# EAGLE board choque (EAGLE 5.06)
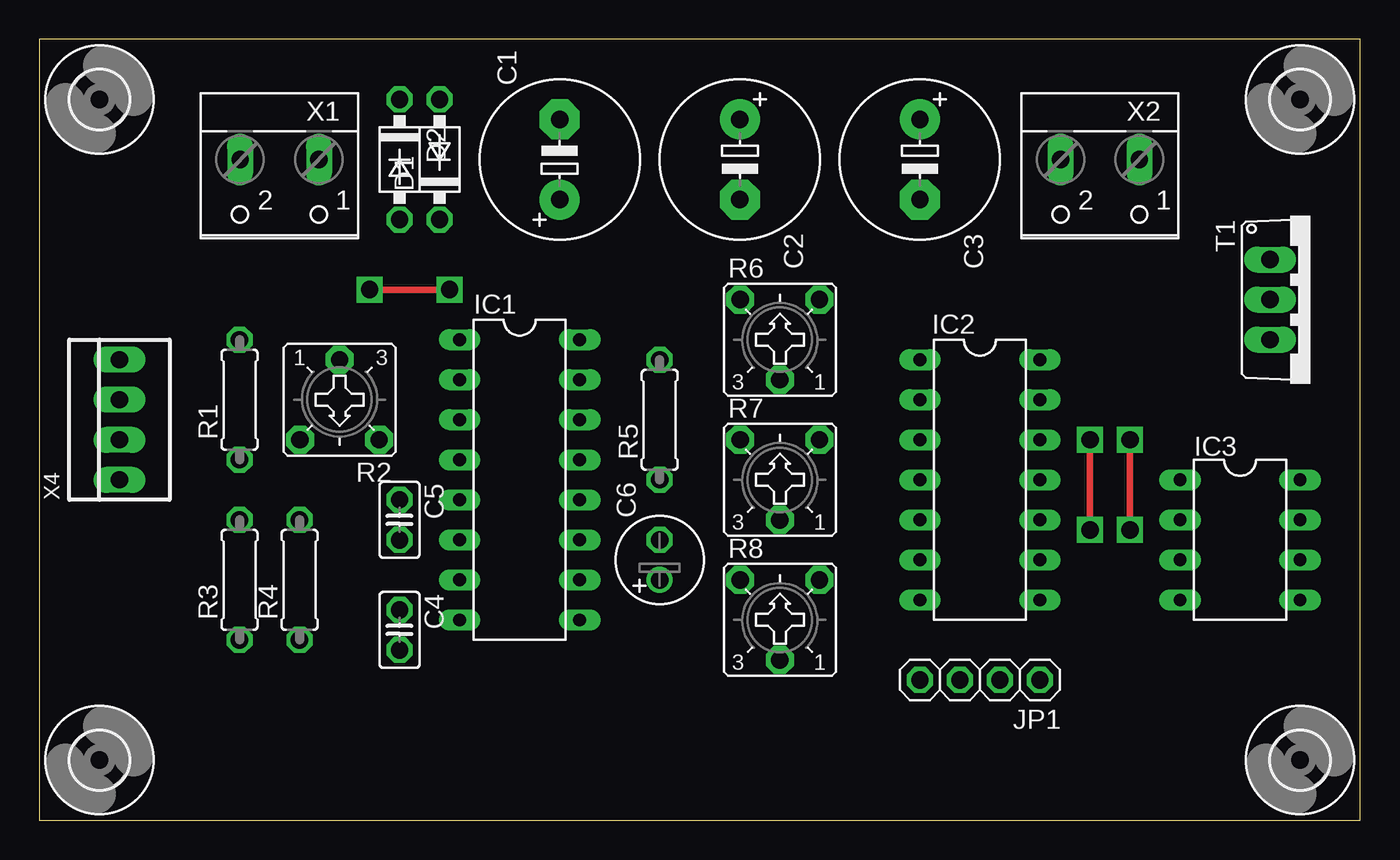
[diagram p0: board, top side]
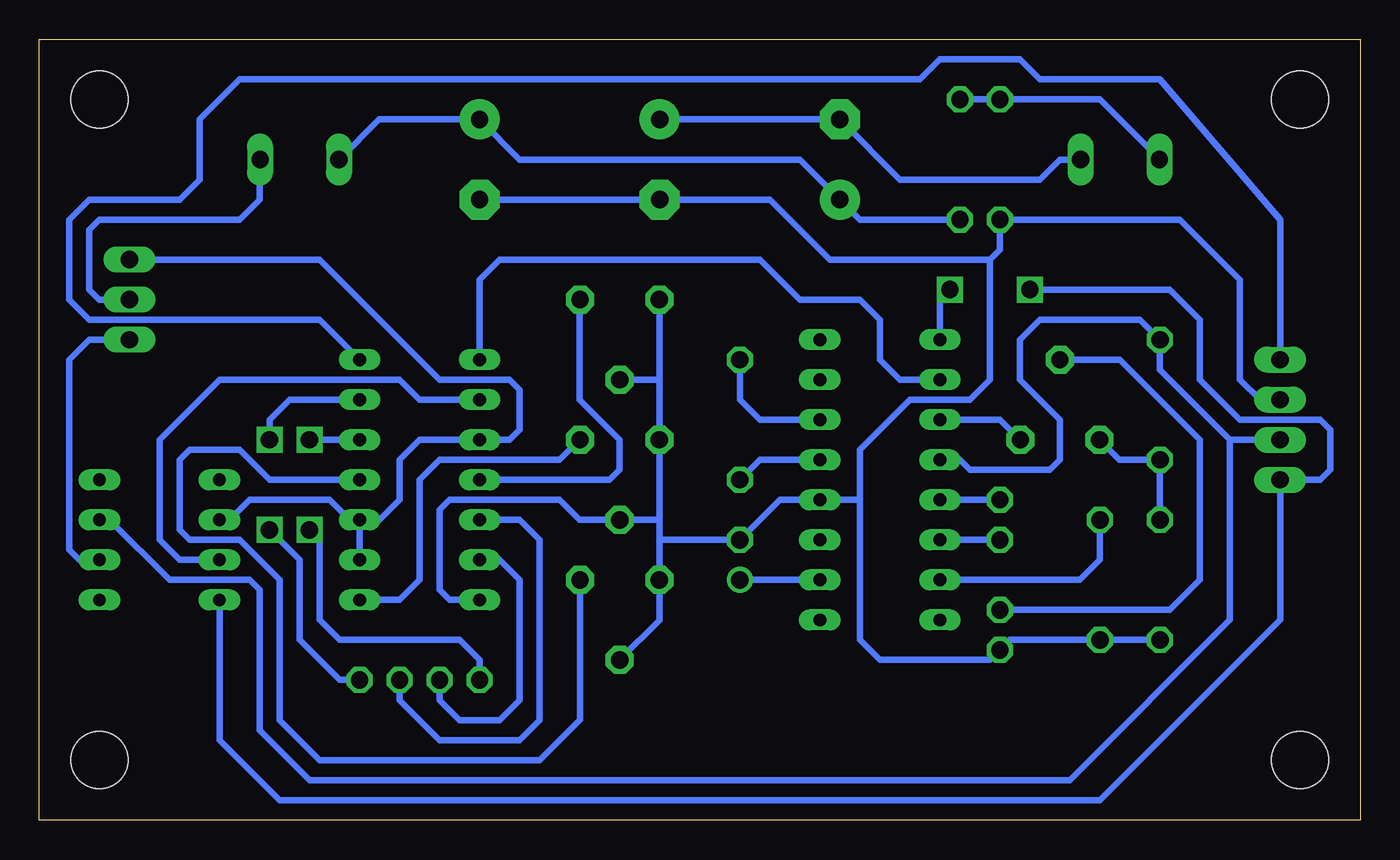
[diagram p1: board, bottom side, seen from below]

Size 83.82 x 49.53 mm. Coordinates in mm from the lower left corner, seen from the top.
Outline: 0,0 83.82,0 83.82,49.53 0,49.53 0,0
Copper layers (1*16): Top 0.035mm / dielectric 1.5mm / Bottom 0.035mm
Design rules "default": minimum track width 10mil, minimum drill 24mil, track to track 8mil, track to pad 8mil, pad to pad 8mil, via to via 8mil, smd to smd 8mil, copper to edge 40mil, drill to drill 8mil, minimum pad ring 10mil, minimum via ring 8mil, stop-mask expansion 4mil, vias tented up to drill 0mil, thermal gap 10mil

## Footprints (pad centres in the part's own frame; a part is rotated, then mirrored left to right if it is on the bottom)
E5-10,5 = drill 1.1 pad 2.54 round: + -2.54,0 | drill 1.1 pad 2.54 octagon: - 2.54,0
C025-025X050 = drill 1.1 octagon: 1 -1.27,0; 2 1.27,0
E2,5-6 = drill 1.1 round: + -1.27,0 | drill 1.1 pad 1.6 octagon: - 1.27,0
DO41-10 = drill 1.1 octagon: A 3.81,0; C -3.81,0
DIL16 = drill 0.813 long: 1 -8.89,-3.81; 2 -6.35,-3.81; 3 -3.81,-3.81; 4 -1.27,-3.81; 5 1.27,-3.81; 6 3.81,-3.81; 7 6.35,-3.81; 8 8.89,-3.81; 9 8.89,3.81; 10 6.35,3.81; 11 3.81,3.81; 12 1.27,3.81; 13 -1.27,3.81; 14 -3.81,3.81; 15 -6.35,3.81; 16 -8.89,3.81
DIL14 = drill 0.813 long: 1 -7.62,-3.81; 2 -5.08,-3.81; 3 -2.54,-3.81; 4 0,-3.81; 5 2.54,-3.81; 6 5.08,-3.81; 7 7.62,-3.81; 8 7.62,3.81; 9 5.08,3.81; 10 2.54,3.81; 11 0,3.81; 12 -2.54,3.81; 13 -5.08,3.81; 14 -7.62,3.81
DIL08 = drill 0.813 long: 1 -3.81,-3.81; 2 -1.27,-3.81; 3 1.27,-3.81; 4 3.81,-3.81; 5 3.81,3.81; 6 1.27,3.81; 7 -1.27,3.81; 8 -3.81,3.81
1X04 = drill 1.1 octagon: 1 -3.81,0; 2 -1.27,0; 3 1.27,0; 4 3.81,0
0207/7 = drill 1.1 octagon: 1 -3.81,0; 2 3.81,0
CT6 = drill 1.1 pad 1.778 octagon: A 2.515,2.54; E -2.515,2.54; S 0,-2.54
TO220 = drill 1.1 long: 1 -2.54,-2.54; 2 0,-2.54; 3 2.54,-2.54
3,6 = hole 3.6: 0,0
W237-102 = drill 1.1 long: 1 -2.5,-1.27; 2 2.5,-1.27
22-23-2041 = drill 1.1 long: 1 -3.81,0; 2 -1.27,0; 3 1.27,0; 4 3.81,0

## Placement (x,y rotation side)
C1  10uF  [E5-10,5]  33.02,41.91 90 top
C2  10uF  [E5-10,5]  44.45,41.91 270 top
C3  10uF  [E5-10,5]  55.88,41.91 270 top
C4  [C025-025X050]  22.86,12.06 270 top
C5  [C025-025X050]  22.86,19.05 270 top
C6  [E2,5-6]  39.37,16.51 90 top
D1  1N4007  [DO41-10]  25.4,41.91 90 top
D2  1N4007  [DO41-10]  22.86,41.91 270 top
IC1  XR2206N  [DIL16]  30.48,21.59 270 top
IC2  4016N  [DIL14]  59.69,21.59 270 top
IC3  LM741  [DIL08]  76.2,17.78 270 top
JP1  [1X04]  59.69,8.89 180 top
R1  [0207/7]  12.7,26.67 90 top
R2  [CT6]  19.05,26.67 180 top
R3  [0207/7]  12.7,15.24 90 top
R4  [0207/7]  16.51,15.24 90 top
R5  [0207/7]  39.37,25.4 90 top
R6  [CT6]  46.99,30.48 0 top
R7  [CT6]  46.99,21.59 0 top
R8  [CT6]  46.99,12.7 0 top
T1  BUX87  [TO220]  80.64,33.02 270 top
U$1  [3,6]  3.81,3.81 0 top
U$2  [3,6]  3.81,45.72 0 top
U$3  [3,6]  80.01,45.72 0 top
U$4  [3,6]  80.01,3.81 0 top
X1  [W237-102]  15.24,40.64 180 top
X2  [W237-102]  67.31,40.64 180 top
X4  22-23-2041  [22-23-2041]  5.08,25.4 90 top

## Library data of the parts
C1-C6 D1 D2 IC1-IC3 JP1 R1-R8 T1 U$1-U$4 X1 X2 X4 = caixa

## Nets
+5V: IC2.14 X4.4
+12V: IC1.4 IC3.7 R1.2 X4.2
-12V: IC1.1 IC3.4 X4.1
CH+: C1.+ C3.+ D1.C X2.2
CH-: T1.2 X2.1
CHSEL0: IC2.13 JP1.1
CHSEL1: IC2.5 JP1.2
CHSEL2: IC2.6 JP1.3
CHSEL3: IC2.12 JP1.4
GND: C2.- C3.- C4.2 C6.- D2.A IC1.12 IC2.7 R3.1 R4.1 R6.E R6.S R7.E R7.S R8.E R8.S X4.3
N$1: D1.A D2.C X1.2
N$2: R1.1 R2.A R3.2
N$3: C1.- C2.+ X1.1
N$4: IC1.3 R2.E
N$5: C4.1 R2.S
N$6: C5.1 IC1.5
N$7: C5.2 IC1.6
N$8: IC1.7 R4.2
N$9: IC1.14 R5.2
N$10: IC1.13 R5.1
N$11: C6.+ IC1.10
N$12: IC2.4 R6.A
N$13: IC1.2 IC2.1
N$15: IC2.8 R7.A
N$16: IC2.11 R8.A
N$20: IC2.2 IC3.3
N$21: IC2.3 IC2.9 IC2.10 IC3.2 T1.1
N$22: IC3.6 T1.3

## Tracks (layer width: path | path; a pad name or v marks a point on that pad's centre or on a via)
+5V
  Bottom 0.406: X4.4 5.08,38.1 12.7,46.99 20.32,46.99 21.59,48.26 26.67,48.26 27.94,46.99 71.12,46.99 73.66,44.45 73.66,40.64 74.93,39.37 80.64,39.37 81.92,38.1 81.92,33.02 80.64,31.75 66.04,31.75 IC2.14
+12V
  Bottom 0.406: IC1.4 25.4,22.86 24.77,22.23 19.68,22.23 19.05,22.86 19.05,25.4 21.59,27.94 21.59,30.48 20.32,31.75 13.97,31.75 R1.2 12.7,28.57 8.26,24.13 | IC3.7 79.38,19.05 75.56,15.24 70.48,15.24 69.85,14.61 69.85,5.71 66.67,2.54 18.41,2.54 8.26,12.7 8.26,24.13 | 8.26,24.13 X4.2
-12V  (via drill 1.1)
  Top 0.406: v20.95,33.66 v26.04,33.66
  Bottom 0.406: IC3.4 72.39,5.08 68.58,1.27 16.51,1.27 5.08,12.7 X4.1 2.54,21.59 1.91,22.23 1.91,24.77 2.54,25.4 7.62,25.4 10.16,27.94 10.16,31.75 12.06,33.66 v20.95,33.66 | IC1.1 26.67,33.02 v26.04,33.66
CH+
  Bottom 0.406: D1.C 31.75,38.1 C1.+ 35.56,41.91 53.34,41.91 C3.+ 62.27,44.45 X2.2
CH-
  Bottom 0.406: T1.2 80.01,33.02 80.64,33.66 80.64,37.47 80.01,38.1 71.12,38.1 69.85,39.37 69.85,41.87 X2.1
CHSEL0  (via drill 1.1)
  Top 0.406: v69.22,18.41 v69.22,24.13
  Bottom 0.406: JP1.1 64.77,8.89 67.31,11.43 67.31,16.51 v69.22,18.41 | IC2.13 67.94,26.67 69.22,25.4 v69.22,24.13
CHSEL1
  Bottom 0.406: JP1.2 60.96,7.62 58.42,5.08 53.34,5.08 52.07,6.35 52.07,17.78 53.34,19.05 IC2.5
CHSEL2
  Bottom 0.406: IC2.6 54.61,16.51 53.34,15.24 53.34,7.62 54.61,6.35 57.15,6.35 58.42,7.62 JP1.3
CHSEL3  (via drill 1.1)
  Top 0.406: v66.67,18.41 v66.67,24.13
  Bottom 0.406: v66.67,24.13 IC2.12 | JP1.4 55.88,10.16 57.15,11.43 64.77,11.43 66.04,12.7 66.04,17.78 v66.67,18.41
GND
  Bottom 0.406: X4.3 6.35,26.67 7.62,27.94 7.62,34.29 11.43,38.1 D2.A 22.86,36.2 23.5,35.56 | 44.48,27.94 R7.E 44.48,19.05 | 44.48,27.94 R6.E | 44.48,27.94 R6.S | 44.48,17.78 R8.E 44.48,12.68 R8.S | 44.48,17.78 44.48,19.05 | 44.48,19.05 R7.S 49.53,19.05 50.8,20.32 57.78,20.32 58.42,19.68 58.42,14.61 57.78,13.97 IC2.7 | 44.48,17.78 C6.- 36.83,20.32 IC1.12 31.75,20.32 | R3.1 R4.1 22.23,11.43 C4.2 23.5,10.16 30.48,10.16 31.75,11.43 31.75,20.32 | C3.- C2.- 37.47,39.37 33.66,35.56 23.5,35.56 | 31.75,20.32 31.75,23.5 28.57,26.67 24.77,26.67 23.5,27.94 23.5,35.56
N$1
  Bottom 0.406: D1.A D2.C 16.51,45.72 12.74,41.95 X1.2
N$2
  Bottom 0.406: R3.2 R1.1 15.27,22.86 R2.A
N$3
  Bottom 0.406: X1.1 19.05,41.91 20.32,40.64 29.21,40.64 C1.- C2.+
N$4
  Bottom 0.406: R2.E 21.59,24.13 22.86,25.4 IC1.3
N$5
  Bottom 0.406: C4.1 12.06,13.34 10.16,15.24 10.16,24.13 15.24,29.21 R2.S
N$6
  Bottom 0.406: C5.1 IC1.5
N$7
  Bottom 0.406: C5.2 IC1.6
N$8
  Bottom 0.406: IC1.7 17.78,15.24 16.51,16.51 R4.2
N$9
  Bottom 0.406: IC1.14 38.1,25.4 39.37,26.67 R5.2
N$10
  Bottom 0.406: IC1.13 38.1,22.86 R5.1
N$11
  Bottom 0.406: IC1.10 C6.+
N$12
  Bottom 0.406: R6.A 49.53,31.73 49.53,26.67 46.99,24.13 46.99,22.23 47.62,21.59 IC2.4
N$13
  Bottom 0.406: IC2.1 55.88,34.29 54.61,35.56 38.1,35.56 35.56,33.02 31.75,33.02 30.48,31.75 30.48,29.21 29.21,27.94 IC1.2
N$15
  Bottom 0.406: IC2.8 60.96,13.97 59.69,15.24 59.69,21.59 58.42,22.86 50.8,22.86 49.53,24.13 R7.A
N$16
  Bottom 0.406: R8.A 49.51,6.38 52.07,3.81 66.04,3.81 68.58,6.35 68.58,15.24 71.12,17.78 74.3,17.78 74.93,18.41 74.93,22.86 74.3,23.5 71.12,23.5 69.22,21.59 IC2.11
N$20
  Bottom 0.406: IC2.2 59.69,26.67 60.96,27.94 72.39,27.94 76.2,24.13 76.2,17.78 74.93,16.51 IC3.3
N$21
  Bottom 0.406: IC2.10 62.23,19.05 60.96,20.32 60.96,22.86 59.69,24.13 IC2.3 53.98,24.13 53.34,24.77 53.34,27.3 53.98,27.94 58.42,27.94 66.04,35.56 T1.1 | IC2.10 IC2.9 | IC2.10 64.14,19.05 65.41,20.32 70.48,20.32 71.75,19.05 IC3.2
N$22
  Bottom 0.406: T1.3 80.64,30.48 81.92,29.21 81.92,17.14 81.28,16.51 IC3.6